# Altium PCB temperature_logger_pcb_v3.PcbDoc
Units mm, origin at the board's own origin, x right, y up, seen from the top; angles counter-clockwise.
Board outline 27 x 38 mm, 2 copper layers (Top Layer, Bottom Layer); 41 components, 32 nets, 188 pads, 42 vias.
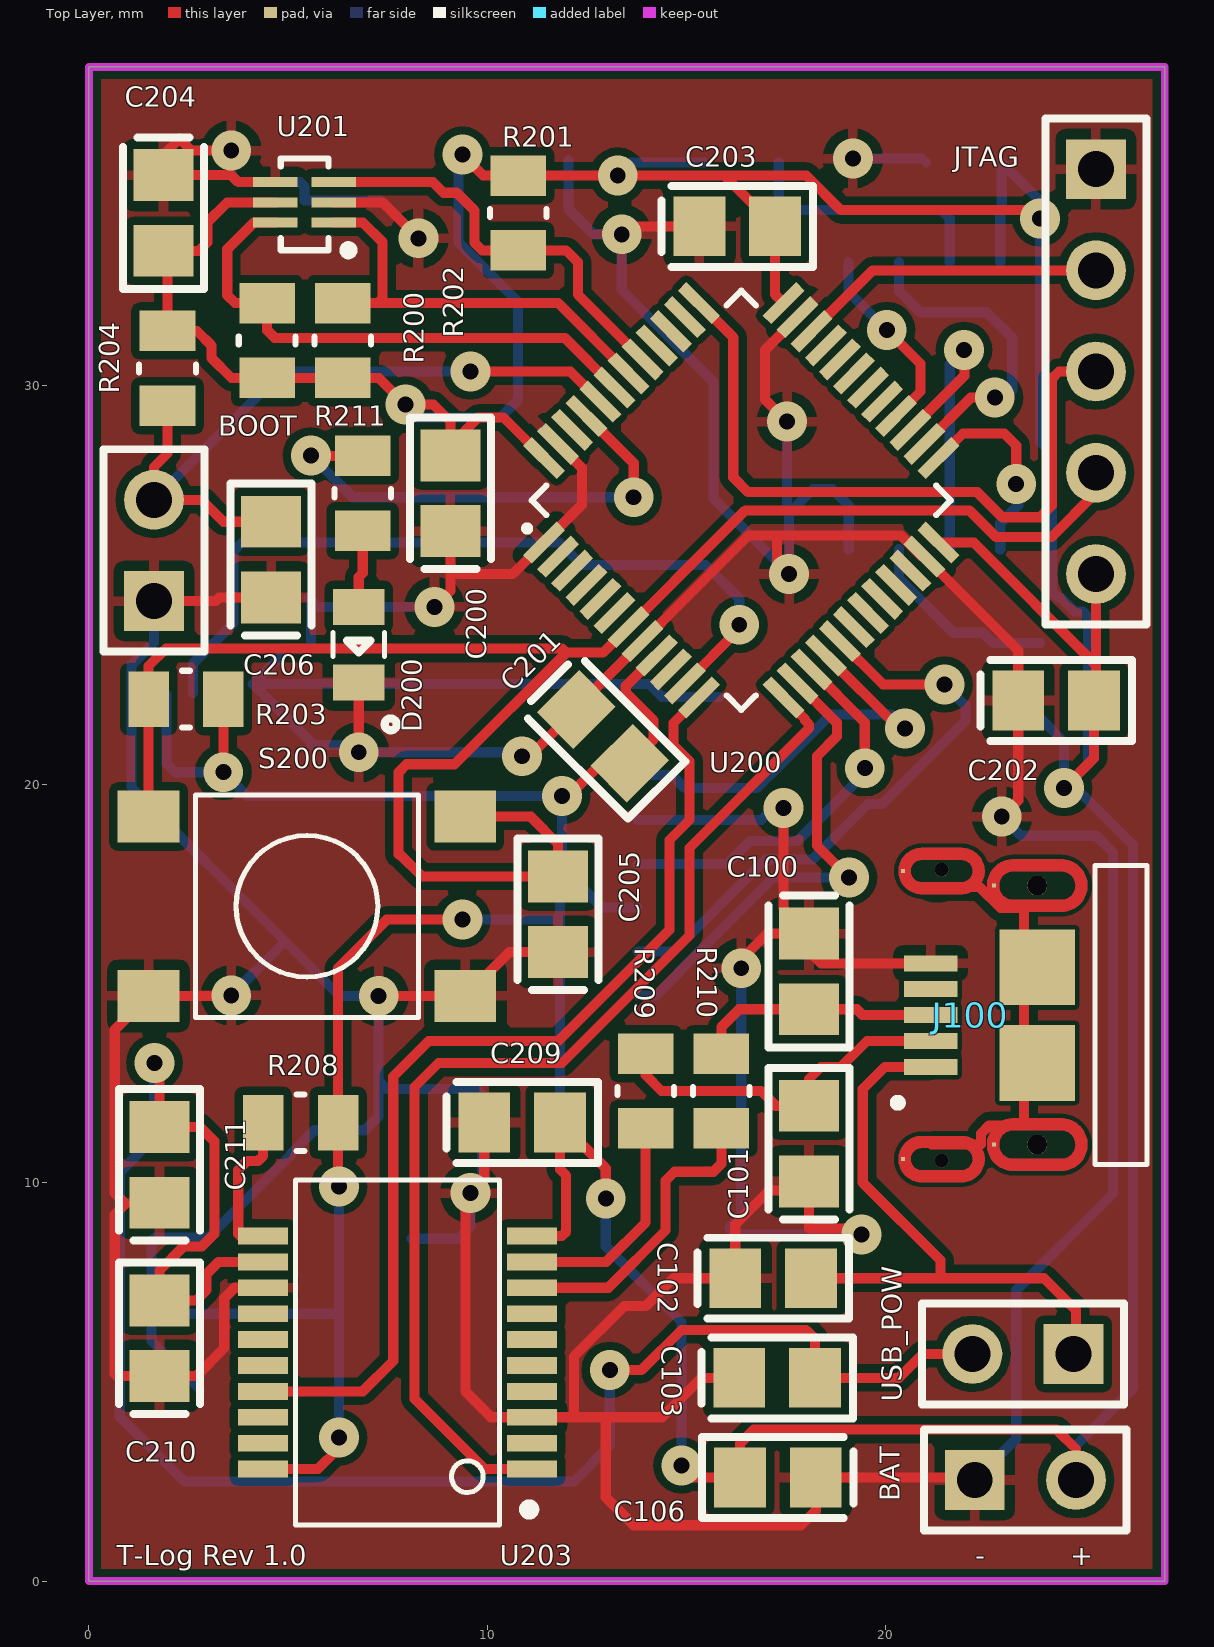
[diagram p0: Top Layer view]
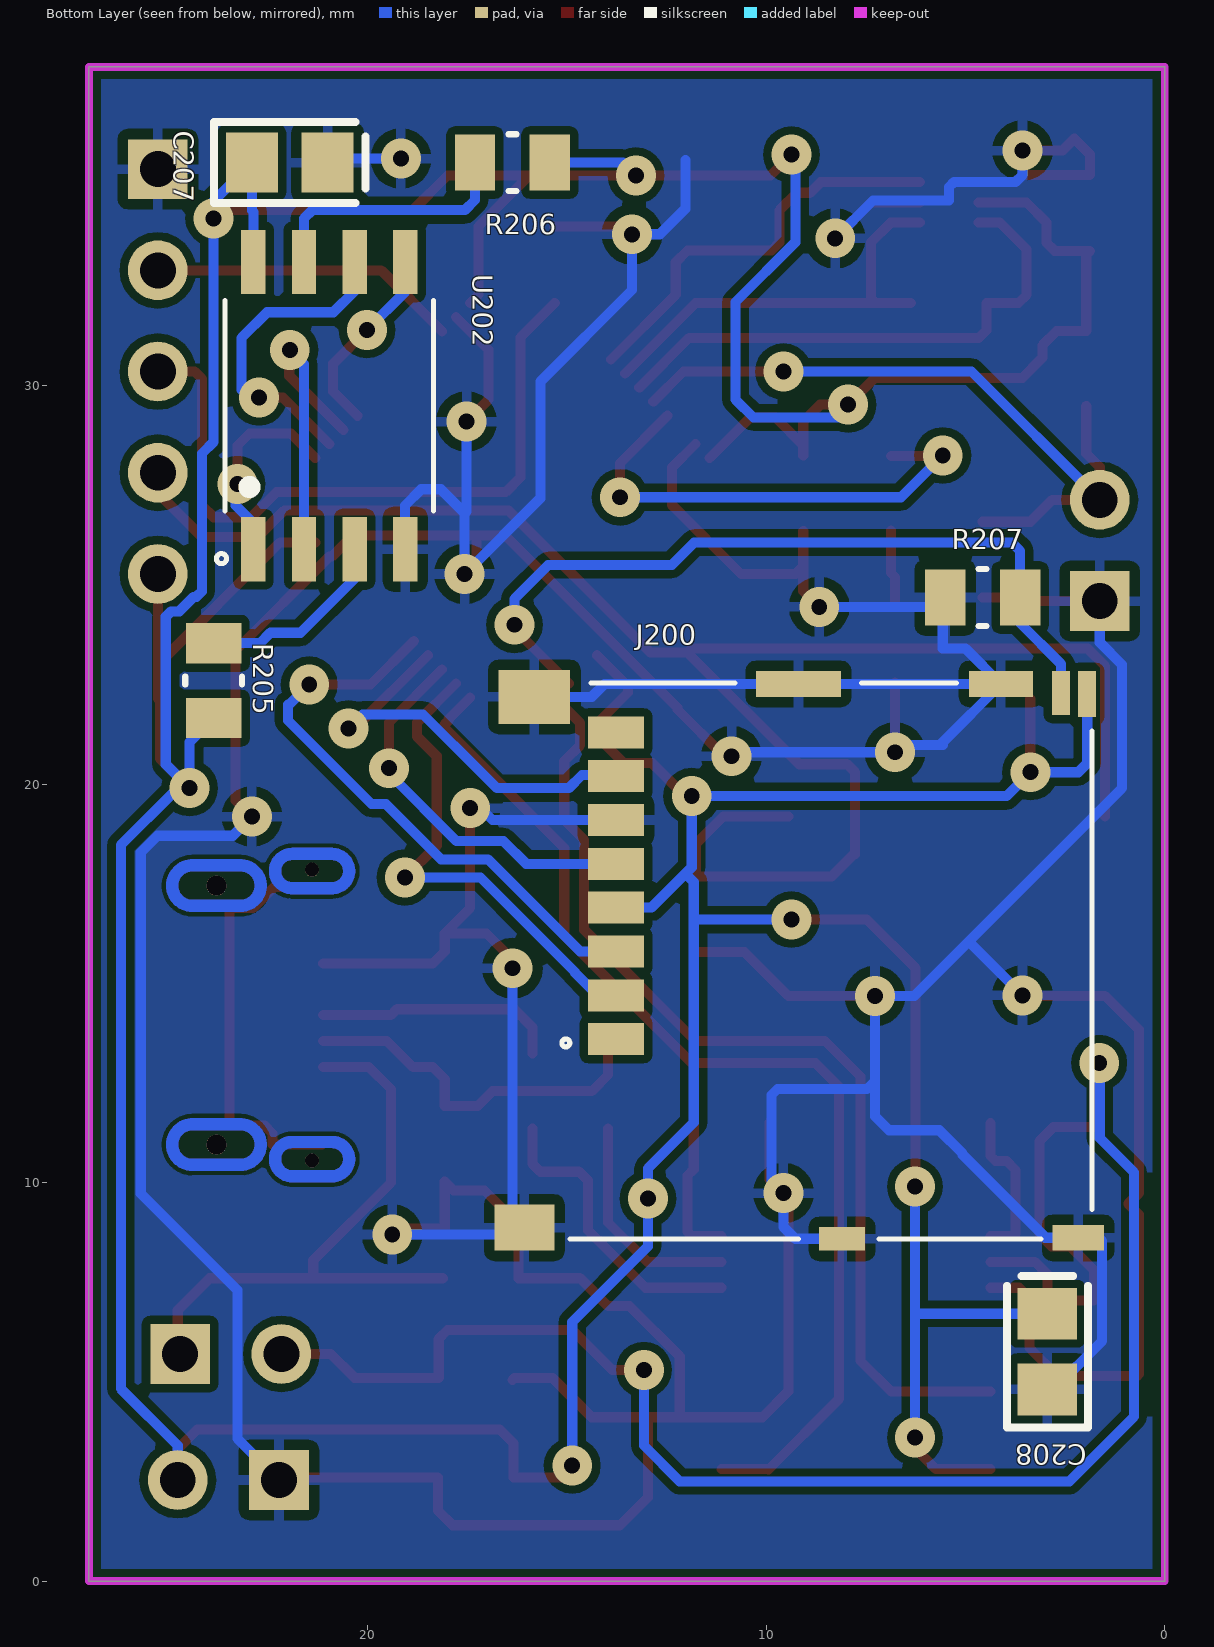
[diagram p1: Bottom Layer view, seen from below]

## Layer stack, top to bottom
Top Solder: solder mask 0.0102, Solder Resist, Dk 3.5
Top Layer: signal copper 0.0356
Dielectric 1: dielectric 0.32, FR-4, Dk 4.8
Bottom Layer: signal copper 0.0356
Bottom Solder: solder mask 0.0102, Solder Resist, Dk 3.5

## Board outline
0,0 0,38 27,38 27,0

## Design rules (kind name [scope] priority, off if disabled: settings)
Clearance STM32F4 [InComponent('U200')] p1: gap=0.152 ignorepadtopadclearanceinfootprint=FALSE
Clearance USB_PORT [InComponent('J100')] p2: gap=0.102 ignorepadtopadclearanceinfootprint=FALSE
Clearance [All] p3: gap=0.203 ignorepadtopadclearanceinfootprint=FALSE
MinimumSolderMaskSliver [All] p1: minsoldermaskwidth=0.152
PolygonConnect [All] p1: connectstyle=Relief reliefconductorwidth=0.254 reliefentries=4 polygonreliefangle="90 Angle" airgapwidth=0.254
RoutingVias [All] p1: holewidth=0.4 width=1 viastyle="Through Hole" minholewidth=0.3 minwidth=1 maxholewidth=0.711 maxwidth=1
SolderMaskExpansion [All] p1: expansion=0.102
Width [All] p1: maxlimit=0.381 minlimit=0.152 preferedwidth=0.254
29 further rules are at their usual default settings.

## Classes and differential pairs
component class 02_MCU: BOOT C200 C201 C202 C203 C204 C205 C206 C207 C208 C209 C210 C211 D200 J200 JTAG R200 R201 R202 R203 R204 R205 R206 R207 R208 R209 R210 R211 S200 U200 U201 U202 U203
component class 01_Power: BAT C100 C101 C102 C103 C106 J100 USB_POW

## Components (designator, comment, footprint, x,y, rotation, side; value= is the part's Value field where it differs from the comment)
BAT "" HDR1X2 22.232,2.535 r0 top
BOOT "" HDR1X2 1.632,24.595 r90 top
C100 "47 pF" C0805 18.072,15.3 r270 top
C101 "47 pF" C0805 18.072,10.977 r90 top
C102 "10 nF" C0805 17.172,7.6 r0 top
C103 "100 nF" C0805 17.272,5.1 r0 top
C106 "10 nF" C0805 17.293,2.6 r180 top
C200 "1000 pF" C0805 9.072,27.3 r90 top
C201 "1000 pF" C0805 12.901,21.2 r315 top
C202 "1000 pF" C0805 24.272,22.1 r0 top
C203 "1000 pF" C0805 16.272,34 r0 top
C204 "1000 pF" C0805 1.872,34.335 r270 top
C205 "1000 pF" C0805 11.772,16.735 r90 top
C206 "1000 pF" C0805 4.572,25.635 r90 top
C207 "1000 pF" C0805 21.96,35.6 r0 bottom
C208 "1000 pF" C0805 2.946,5.76 r270 bottom
C209 "100 nF" C0805 10.872,11.507 r0 top
C210 "1000 pF" C0805 1.771,6.093 r90 top
C211 "47 pF" C0805 1.771,10.443 r90 top
D200 "LGR971" D0805 6.772,23.5 r270 top value="Green LED"
J100 "USB_Micro_B" MicroUSB 23.8,14.204 r90 top value="USB Micro B"
J200 "MicroSD" MicroSD 9.022,15.565 r270 bottom
JTAG "" HDR1X5 25.272,35.435 r270 top
R200 "5 k" R0805 4.472,31.135 r90 top value=5k
R201 "5 k" R0805 10.772,34.335 r270 top value=5k
R202 "5 k" R0805 6.372,31.135 r90 top value=5k
R203 "1 k" R0805 2.436,22.135 r180 top value=1k
R204 "1 k" R0805 1.972,30.435 r270 top value=1k
R205 "1 k" R0805 23.872,22.6 r90 bottom value=1k
R206 "1 k" R0805 16.372,35.6 r0 bottom value=1k
R207 "10 k" R0805 4.572,24.685 r0 bottom value=10k
R208 "1 k" R0805 5.311,11.5 r180 top value=1k
R209 "27" R0805 13.972,12.3 r90 top
R210 "27" R0805 15.872,12.3 r90 top
R211 "1 k" R0805 6.872,27.3 r90 top value=1k
S200 "Switch_tactile" Tactile1 5.472,16.935 r180 top value=Switch_Tactile
U200 "STM32L053" LQFP48-7x7mm 16.372,27.124 r45 top locked value=STM32L053C8T6
U201 "TMP112" SOT563 5.413,34.6 r180 top value=TMP112AIDRLT
U202 "16MB_FLASH" 8-SOIC 20.968,29.5 r90 bottom value=MX25R1635FM2IH1
U203 "FT231XS-R" SSOP20 7.746,5.735 r90 top
USB_POW "" HDR1X2 24.712,5.7 r180 top

## Footprints (in the part's own frame and the unit in brackets; to place one, negate y for a bottom-side part, rotate by r counter-clockwise, add the part's x,y. Pads: shape width x height; smd on the part's side, far side on the other; paste and mask are expansions set on the pad)
8-SOIC [mm]
  rect 1.61x0.61 smd: 1(-3.605,1.905) 2(-3.605,0.635) 3(-3.605,-0.635) 4(-3.605,-1.905) 5(3.605,-1.905) 6(3.605,-0.635) 7(3.605,0.635) 8(3.605,1.905)
  silkscreen extent -3.97,-2.62 2.64,2.83
C0805 [mm] "Chip Capacitor; Body 2.0 x 1.2 mm (LxW typ)"
  rect 1.3x1.5 smd: 1(-0.95,0) 2(0.95,0)
  silkscreen extent -1.9,-1.02 1.91,1.02
D0805 [mm]
  rect 0.9x1.3 smd: A(-0.95,0) C(0.95,0)
  silkscreen extent -0.3,-0.65 2.15,0.95
HDR1X2 [mm] "Connector; Header; 2 Position"
  rect 1.5x1.5 hole 0.9: 1(0,0)
  round 1.5 hole 0.9: 2(2.54,0)
  silkscreen extent -1.27,-1.27 3.81,1.27
HDR1X5 [mm] "Connector; Header; 5 Position"
  rect 1.5x1.5 hole 0.9: 1(0,0)
  round 1.5 hole 0.9: 2(2.54,0) 3(5.08,0) 4(7.62,0) 5(10.16,0)
  silkscreen extent -1.27,-1.27 11.43,1.27
LQFP48-7x7mm [mm]
  rect 1.194x0.305 smd: 1(-4.25,2.75) 2(-4.25,2.25) 3(-4.25,1.75) 4(-4.25,1.25) 5(-4.25,0.75) 6(-4.25,0.25) 7(-4.25,-0.25) 8(-4.25,-0.75) 9(-4.25,-1.25) 10(-4.25,-1.75) 11(-4.25,-2.25) 12(-4.25,-2.75) 25(4.25,-2.75) 26(4.25,-2.25) 27(4.25,-1.75) 28(4.25,-1.25) 29(4.25,-0.75) 30(4.25,-0.25) 31(4.25,0.25) 32(4.25,0.75) 33(4.25,1.25) 34(4.25,1.75) 35(4.25,2.25) 36(4.25,2.75)
  rect 0.305x1.194 smd: 13(-2.75,-4.25) 14(-2.25,-4.25) 15(-1.75,-4.25) 16(-1.25,-4.25) 17(-0.75,-4.25) 18(-0.25,-4.25) 19(0.25,-4.25) 20(0.75,-4.25) 21(1.25,-4.25) 22(1.75,-4.25) 23(2.25,-4.25) 24(2.75,-4.25) 37(2.75,4.25) 38(2.25,4.25) 39(1.75,4.25) 40(1.25,4.25) 41(0.75,4.25) 42(0.25,4.25) 43(-0.25,4.25) 44(-0.75,4.25) 45(-1.25,4.25) 46(-1.75,4.25) 47(-2.25,4.25) 48(-2.75,4.25)
  silkscreen extent -4.38,-3.72 3.72,3.72, body extent 0,0 0.25,0.25, height 0.25
MicroSD [mm]
  rect 0.8x1.4 smd: 1(1.965,-4.75) 2(0.865,-4.75) 3(-0.235,-4.75) 4(-1.335,-4.75) 5(-2.435,-4.75) 6(-3.535,-4.75) 7(-4.635,-4.75) 8(-5.735,-4.75)
  rect 1.15x0.45 smd: 9(-6.7,7.075)
  rect 1.1x0.45 smd: 10(-6.725,6.415)
  rect 1.35x1.8 smd: 11(-6.625,-6.8)
  rect 0.65x2.14 smd: 12(-6.95,-0.17)
  rect 0.65x1.6 smd: 13(-6.95,4.91)
  rect 0.65x1.3 smd: 14(6.95,6.85)
  rect 0.6x1.15 smd: 15(6.975,0.925)
  rect 1.16x1.5 smd: 16(6.695,-7.05)
  silkscreen extent -6.98,-6.11 6.98,7.2
MicroUSB [mm]
  rect 0.4x1.35 smd: 1(-1.3,2.675) 2(-0.65,2.675) 3(0,2.675) 4(0.65,2.675) 5(1.3,2.675)
  round 0.35 hole 0.35 unplated: None(-3.65,2.4) None(3.65,2.4)
  round 0.5 hole 0.5 unplated: None(-3.25,0) None(3.25,0)
  rect 0.1x0.1 smd: S1(-3.25,1.08) S2(3.25,1.08) S3(-3.615,3.369) S6(3.615,3.369)
  rect 1.9x1.9 smd: S4(-1.2,0) S5(1.2,0)
  Top Layer region: 258 vertices and 0 holes, not listed, extent -3.91,-1.26 -2.59,1.26
  Top Layer region: 258 vertices and 0 holes, not listed, extent 2.59,-1.26 3.91,1.26
  Top Layer region: 258 vertices and 0 holes, not listed, extent -4.195,1.32 -3.035,3.48
  Top Layer region: 258 vertices and 0 holes, not listed, extent 3.035,1.32 4.195,3.48
  Bottom Layer region: 258 vertices and 0 holes, not listed, extent -3.91,-1.26 -2.59,1.26
  Bottom Layer region: 258 vertices and 0 holes, not listed, extent 2.59,-1.26 3.91,1.26
  Bottom Layer region: 258 vertices and 0 holes, not listed, extent -4.195,1.32 -3.035,3.48
  Bottom Layer region: 258 vertices and 0 holes, not listed, extent 3.035,1.32 4.195,3.48
  silkscreen extent -3.75,-2.75 3.75,3.6
R0805 [mil]
  rect 40x55 smd: 1(-37,0) 2(37,0)
  silkscreen extent -4,-28 4,28
SOT563 [mil]
  rect 44x10 smd: 1(-29,20) 2(-29,0) 3(-29,-20) 4(29,-20) 5(29,0) 6(29,20)
  silkscreen extent -47,-43 24,51
SSOP20 [mm]
  rect 0.42x1.25 smd: P$1(-2.925,-3.375) P$2(-2.275,-3.375) P$3(-1.625,-3.375) P$4(-0.975,-3.375) P$5(-0.325,-3.375) P$6(0.325,-3.375) P$7(0.975,-3.375) P$8(1.625,-3.375) P$9(2.275,-3.375) P$10(2.925,-3.375) P$11(2.925,3.375) P$12(2.275,3.375) P$13(1.625,3.375) P$14(0.975,3.375) P$15(0.325,3.375) P$16(-0.325,3.375) P$17(-0.975,3.375) P$18(-1.625,3.375) P$19(-2.275,3.375) P$20(-2.925,3.375)
  silkscreen extent -4.33,-3.43 4.33,2.56
Tactile1 [mm] "6 mm x 6 mm"
  rect 1.55x1.3 smd: 1(-3.975,2.25) 2(3.975,2.25) 3(-3.975,-2.25) 4(3.975,-2.25)
  silkscreen extent -2.79,-2.79 2.79,2.79

## Part data
BAT BOOT USB_POW: library part "Header 2", "Header, 2-Pin", LatestRevisionDate=17-Jul-2002, LatestRevisionNote="Re-released for DXP Platform.", Publisher="Altium Limited"
C100 C101 C211: library part Cap-47pF, "CAP CER 47PF 1KV C0G/NP0 0805", Manufacturer=KEMET, Manufacturer Part Number=C0805C470JDGACTU, Package=C0805, Digikey_link=https://www.digikey.com.au/product-detail/en/kemet/C0805C470JDGACTU/399-7157-1-ND/3439404, Price="0.62 AUD"
C102 C106: library part Cap-10nF, "CAP CER 10000PF 10V X7R 0805", Manufacturer="Wurth Electronics Inc.", Manufacturer Part Number=885012207011, Package=C0805, Digikey_link=https://www.digikey.com.au/product-detail/en/wurth-electronics-inc/885012207011/732-8021-1-ND/5454648, Price="0.15 AUD"
C103 C209: library part Cap-100nF, "CAP CER 0.1UF 50V X7R 0805", Manufacturer=KEMET, Manufacturer Part Number=C0805X104K5RACTU, Package=C0805, Digikey_link=https://www.digikey.com.au/product-detail/en/kemet/C0805X104K5RACTU/399-5330-1-ND/1842309, Price="0.46 AUD"
C200 C201 C202 C203 C204 C205 C206 C207 C208 C210: library part Cap-1000pF, "CAP CER 1000PF 100V X7R 0805", Manufacturer=KEMET, Manufacturer Part Number=C0805C102K1RACTU, Package=C0805, Digikey_link=https://www.digikey.com.au/product-detail/en/kemet/C0805C102K1RACTU/399-1148-2-ND/411147, Price="0.035 USD"
D200: "LED GREEN DIFFUSED 0805 SMD", Manufacturer="Osram Opto", Manufacturer Part Number="LG R971-KN-1", Package=LED0805, Digikey_link=https://www.digikey.com.au/product-detail/en/osram-opto-semiconductors-inc/LG-R971-KN-1/475-1410-2-ND/1227925, Price="0.09 USD"
J100: "USB - micro B USB 2.0 Receptacle Connector 5 Position Surface Mount, Right Angle; Through Hole", Manufacturer="TE Connectivity", Manufacturer Part Number=2040002-1, Package=USB-Micro-B, Digikey_link=https://www.digikey.com.au/product-detail/en/te-connectivity-amp-connectors/2040002-1/A108263CT-ND/4021990, Price="3.03 USD", Product_Type=Connector
J200: "MICRO SD PUSH PUSH LOW PROFILE TYPE", Manufacturer="TE Connectivity", Manufacturer Part Number=2201778-1, Digikey_link=https://www.digikey.com.au/product-detail/en/te-connectivity-amp-connectors/2201778-1/A118117CT-ND/4729820, Package=MicroSD, Price="3.61 USD", Product_Type="Removable Memory Products"
JTAG: library part "Header 5", "Header, 5-Pin", LatestRevisionDate=17-Jul-2002, LatestRevisionNote="Re-released for DXP Platform.", Publisher="Altium Limited"
R200 R201 R202: library part Res-5k, "RES SMD 4.7K OHM 0.1% 1/8W 0805", Manufacturer="Panasonic Electronic Components", Manufacturer Part Number=ERA-6AEB472V, Package=R0805, Digikey_link=https://www.digikey.com.au/product-detail/en/panasonic-electronic-components/ERA-6AEB472V/P4.7KDACT-ND/1465963, Price="0.51 AUD"
R203 R204 R205 R206 R208 R211: library part Res-1k, "RES 1K OHM 0.1% 1/5W 0805", Manufacturer="Vishay Dale", Manufacturer Part Number=TNPW08051K00BEEA, Package=R0805, Digikey_link=https://www.digikey.com.au/product-detail/en/vishay-dale/TNPW08051K00BEEA/TNP1.00KABTR-ND/1607282, Price="0.03 USD"
R207: library part Res-10k, "RES SMD 10K OHM 0.1% 1/8W 0805", Manufacturer="Panasonic Electronic Components", Manufacturer Part Number=ERA-6AEB103V, Package=R0805, Digikey_link=https://www.digikey.com/product-detail/en/panasonic-electronic-components/ERA-6AEB103V/P10KDACT-ND/1465971, Price="0.36 AUD"
R209 R210: library part Res-27, "RES SMD 27 OHM 5% 1/8W 0805", Manufacturer="Panasonic Electronic Components", Manufacturer Part Number=ERJ-6GEYJ270V, Package=R0805, Digikey_link=https://www.digikey.com.au/product-detail/en/panasonic-electronic-components/ERJ-6GEYJ270V/P27ACT-ND/42810, Price="0.11 AUD"
S200: "SWITCH TACTILE SPST-NO 0.05A 12V", Manufacturer="C&K Components", Manufacturer Part Number=PTS645SM43SMTR, Package=6x6, Digikey_link=https://www.digikey.com.au/product-detail/en/c-k/PTS645SM43SMTR92-LFS/CKN9112CT-ND/1146934, Price="0.22 USD"
U200: library part STM32L0x3CL4, "IC MCU 32BIT 64KB FLASH 48LQFP", Manufacturer=STMicroelectronics, Manufacturer Part Number=STM32L053C8T6, Package=48LQFP, Digikey_link=https://www.digikey.com.au/product-detail/en/stmicroelectronics/STM32L053C8T6/497-14906-ND/4935255, Price="5.66 AUD"
U201: library part TMP112AIDRLT, "1.4V-Capable ?0.5?C Temperature Sensor with Alert Function and I2C/SMBus interface in SOT-563 6-SOT -40 to 125", Manufacturer="Texas Instruments", Package=SOT-563, Digikey_link=https://www.digikey.com/product-detail/en/texas-instruments/TMP112AIDRLR/296-38578-2-ND/2232593, Manufacturer Part Number=TMP112AIDRLT, Price="1 USD"
U202: library part MX25R1635, "IC FLASH 16M SPI 80MHZ 8SOP", Manufacturer=Macronix, Manufacturer Part Number=MX25R1635FM2IL0, Package=SOP-8, Digikey_link=https://www.digikey.com/product-detail/en/macronix/MX25R1635FM2IH1/1092-1176-ND/5957737, Price="0.97 USD"
U203: "USB Full Speed to Full Handshake UART with USB Charger Detection", Package="SSOP-20 FTDI", Availability=Good, MF=FTDI,, MP=FT231XS-R, Price="1.80 USD", SnapEDA_Link=https://www.snapeda.com/parts/FT231XS-R/FTDI%2C%20Future%20Technology%20Devices%20International%20Ltd/view-part/?ref=snap

## Via types
v1: diameter 1, hole 0.4, Top Layer to Bottom Layer, 42 vias

## Nets (pads, with @x,y where several pads share a name; then routed paths per layer and width w, separated by ;. In a path a pad name is that pad's centre, name@x,y a point inside that pad or via, vN(x,y) a via of type N, cw(c..) or ccw(c..) an arc to the next point about the centre after c; other vN are vias at no path point)
3V: BAT.2 C106.2 C200.2 C201.2 C202.2 C203.2 C204.2 C207.2 C208.1 C209.2 J200.4 J200.9 JTAG.5 R200.1 R201.1 R202.1 R203.1 R204.1 R205.1 R206.1 R208.1 U200.9 U200.24 U200.36 U200.48 U201.5 U202.8 U203.P$10 U203.P$20 | length 182.2
  Top Layer w0.254: v1(3.372,20.3) 3.376,20.305 R203.1 ; U203.P$20 5.746,2.81 6.251,3.315 6.251,3.579 v1(6.272,3.6) ; U201.5 3.472,34.6 2.972,34.1 2.972,33.595 2.761,33.385 C204.2 1.972,33.285 R204.1 2.71,31.375 3.072,31.013 3.072,30.7 3.576,30.195 R200.1 R202.1 7.276,30.195 v1(7.946,29.525) 8.647,29.525 9.072,29.1 C200.2@9.072,28.5 ; v1(6.272,9.9) 6.251,9.921 R208.1 6.251,15.379 7.472,16.6 v1(9.372,16.6) ; C200.2 C200.2@9.072,28.5 ; v1(9.372,35.8) 9.897,35.275 R201.1 v1(13.272,35.275) 15.947,35.275 ; U203.P$10 11.872,8.66 11.976,8.765 11.976,10.178 11.822,10.333 C209.2 12.972,10.357 v1(12.972,9.6) ; U200.48 10.407,29.2 9.772,29.2 C200.2@9.072,28.5 ; v1(11.872,19.7) 12.032,19.7 12.86,20.528 C201.2 14.172,21.127 14.172,21.6 13.472,22.3 13.472,22.456 U200.9 ; v1(14.872,2.9) 15.172,2.6 C106.2 16.343,3.459 16.684,3.8 24.287,3.8 24.772,3.315 BAT.2 ; U200.36 17.222,32.284 C203.2 15.947,35.275 ; U200.24 22.208,26.063 25.272,23 ; v1(23.872,34.2) 23.772,34.2 23.565,34.407 18.872,34.407 18.004,35.275 15.947,35.275 ; v1(24.473,19.9) 25.222,20.648 C202.2 25.272,22.15 25.272,23 ; JTAG.5 25.272,23
  Bottom Layer w0.254: J200.9 1.947,20.525 2.172,20.3 v1(3.372,20.3) 3.972,19.7 v1(11.872,19.7) 11.872,17.913 12.032,17.753 ; C208.1@2.397,6.71 C208.1 6.262,6.71 6.272,6.7 ; v1(6.272,3.6) 6.272,6.7 ; v1(6.272,9.9) 6.272,6.7 ; v1@7.946,29.2 10.322,29.2 10.772,29.65 10.772,32.1 9.272,33.6 9.272,35.7 9.312,35.66 9.372,35.72 v1(9.372,35.8) ; v1(9.372,16.6) 11.822,16.6 ; v1(13.272,35.275) 13.597,35.6 R206.1 ; J200.4 12.885,16.9 12.032,17.753 ; v1(14.872,2.9) 14.872,6.5 12.972,8.4 v1(12.972,9.6) 12.972,10.357 11.822,11.507 11.822,16.6 ; U202.8 22.873,34.363 22.91,34.4 C207.2 23.872,34.638 v1(23.872,34.2) 23.872,28.593 24.165,28.3 24.165,24.841 24.305,24.7 24.372,24.7 24.734,24.337 24.934,24.337 25.072,24.2 25.072,20.498 v1(24.473,19.9) ; R205.1 24.473,21.058 v1(24.473,19.9) ; BAT.2 24.772,3.4 26.2,4.828 26.2,18.472 24.872,19.8 24.573,19.8 v1(24.473,19.9) ; 11.822,16.6 11.822,17.543 12.032,17.753
5V: C103.2 C210.2 C211.2 U203.P$12 USB_POW.2 | length 47.5
  Top Layer w0.254: v1(1.644,13.004) 1.644,13.073 1.771,13.2 C211.2 2.778,11.393 2.785,11.4 3.146,11.038 3.146,8.71 2.836,8.4 2.376,8.4 1.771,7.795 C210.2 2.689,7.043 2.946,7.3 2.946,7.7 3.256,8.01 U203.P$12 ; v1(13.072,5.3) 13.872,5.3 14.872,6.3 18,6.3 18.222,6.078 C103.2 20.328,5.1 20.928,5.7 USB_POW.2
  Bottom Layer w0.254: v1(1.644,13.004) 1.644,13.248 1.632,13.26 1.632,11.117 0.772,10.257 0.772,4.125 2.397,2.5 12.172,2.5 13.072,3.4 v1(13.072,5.3)
ALERT: R201.2 U200.41 U201.3 | length 10.5
  Top Layer w0.254: U201.3 8.635,35.108 8.9,34.843 9.229,34.843 9.672,34.4 9.672,33.595 9.872,33.395 R201.2 11.976,33.395 12.272,33.1 12.272,32.285 U200.41
BOOT0: BOOT.2 C206.2 R204.2 U200.44 | length 18.5
  Top Layer w0.254: R204.2 1.972,28.3 1.632,27.96 BOOT.2 2.826,27.135 3.376,26.585 C206.2 ; v1(9.572,30.355) 12.08,30.355 U200.44
  Bottom Layer w0.254: BOOT.2 4.852,30.355 v1(9.572,30.355)
CARD_DETECT: J200.10 R207.1 U200.11 | length 20
  Top Layer w0.254: U200.11 16.322,23.892 v1(16.322,24)
  Bottom Layer w0.254: J200.10 2.607,23.019 3.632,24.044 R207.1 3.632,25.854 3.841,26.063 11.808,26.063 12.372,25.5 15.472,25.5 16.322,24.65 v1(16.322,24)
FLASH_CSN: U200.25 U202.1 | length 5.2
  Top Layer w0.254: U200.25 21.937,28.8 22.972,28.8 23.272,28.5 v1(23.272,27.535)
  Bottom Layer w0.254: U202.1 22.873,26.551 23.322,27 23.322,27.485 v1(23.272,27.535) v1@23.322,27.535
FLASH_MISO: U200.27 U202.2 | length 7.8
  Top Layer w0.254: U200.27 21.972,30.249 21.972,30.888 v1(21.96,30.9)
  Bottom Layer w0.254: U202.2 21.603,30.543 v1(21.96,30.9) v1@21.982,30.878
FLASH_MOSI: U200.28 U202.5 | length 4.9
  Top Layer w0.254: v1(20.025,31.4) 20.872,30.553 20.872,29.856 U200.28
  Bottom Layer w0.254: U202.5 19.063,32.362 v1(20.025,31.4)
FLASH_SCLK: U200.26 U202.6 | length 8.1
  Top Layer w0.254: U200.26 22.129,29.7 v1(22.734,29.7)
  Bottom Layer w0.254: U202.6 20.333,32.377 20.866,31.844 22.528,31.844 23.172,31.2 23.172,29.9 22.972,29.7 v1(22.734,29.7)
FT_RX: U200.13 U203.P$1 | length 27.5
  Top Layer w0.254: U203.P$1 9.956,2.81 9.946,2.8 8.172,4.575 8.172,12.4 8.772,13 11.872,13 15.072,16.2 15.072,18.4 18.072,21.4 18.072,21.5 17.972,21.6 17.972,21.635 U200.13
FT_TX: U200.12 U203.P$17 | length 25.6
  Top Layer w0.254: U203.P$17 6.872,4.76 7.637,5.525 7.637,12.665 8.525,13.554 11.779,13.554 14.572,16.347 14.572,18.6 15.072,19.1 15.072,20.58 14.672,20.98 14.672,21.535 U200.12
GND: BAT.1 BOOT.1 C100.1 C101.1 C102.1 C103.1 C106.1 C200.1 C201.1 C202.1 C203.1 C204.1 C205.1 C206.1 C207.1 C208.2 C209.1 C210.1 C211.1 D200.C J100.5 J200.6 J200.11 J200.12 J200.13 J200.14 J200.15 J200.16 JTAG.1 R207.2 S200.1 S200.2 U200.1 U200.8 U200.23 U200.35 U200.47 U201.2 U201.4 U202.4 U203.P$3 U203.P$13 | length 243.7
  Top Layer w0.254: BOOT.1 3.182,24.595 3.272,24.685 C206.1 ; v1(3.572,14.7) 3.557,14.685 S200.2 0.646,13.835 0.646,9.735 0.914,9.468 0.646,9.2 0.646,5.2 0.704,5.143 C210.1 2.689,5.143 3.396,5.85 3.396,7.1 3.656,7.36 U203.P$13 ; v1(3.572,35.9) 2.572,35.9 2.272,36.2 1.872,35.8 C204.1 3.572,35.285 3.749,35.108 U201.4 ; U201.2 7.372,34.6 v1(8.272,33.7) ; v1(6.772,20.8) D200.C ; v1(7.272,14.685) S200.1 10.547,15.785 C205.1 ; v1(8.672,24.45) 9.072,24.85 9.072,25.475 ; C200.1 9.072,25.475 ; C209.1 9.922,10.085 v1(9.572,9.735) 9.447,9.61 9.447,4.76 10.097,4.11 U203.P$3 12.172,4.11 ; v1(10.872,20.7) 11.058,20.7 C201.1 12.229,21.921 16.551,26.243 17.272,26.243 ; U200.47 12.372,27.942 12.372,27.013 10.633,25.275 9.272,25.275 9.072,25.475 ; v1(13.372,33.8) 13.572,34 C203.1 ; C103.1@16.372,5.05 C103.1 15.372,5.1 14.382,4.11 12.972,4.11 ; v1(16.372,15.379) 16.372,15.6 17.022,16.25 C100.1 ; v1(17.432,19.4) 17.432,16.889 C100.1 ; v1(17.522,29.1) 16.972,29.65 16.972,30.906 U200.35 ; v1(17.572,25.275) 17.272,25.575 17.272,26.243 ; v1(19.389,8.698) 19.24,8.847 18.072,8.847 C101.1 17.845,9.8 17.072,9.8 16.222,8.95 C102.1 14.672,7.6 13.972,6.9 13.432,6.9 12.172,5.64 12.172,4.11 ; J100.5 18.375,15.504 18.372,15.5 18.072,15.8 C100.1 ; BAT.1 22.167,2.6 C106.1 18.243,1.771 17.872,1.4 13.672,1.4 12.972,2.1 12.972,4.11 ; v1(22.91,19.185) 23.322,19.597 23.322,23.356 U200.23 20.908,25.71 20.376,26.243 17.272,26.243 ; 12.172,4.11 12.972,4.11
  Bottom Layer w0.254: BOOT.1 1.632,23.56 1.072,23 1.072,19.9 4.872,16.1 ; C208.2@2.785,4.81 1.572,6.023 1.572,8.53 1.657,8.615 J200.14 2.988,8.615 5.072,10.699 5.072,10.729 5.657,11.314 6.923,11.314 7.272,11.662 7.272,12.55 ; v1(3.572,14.7) 4.872,16 4.872,16.1 ; v1(3.572,35.9) 3.572,35.285 3.749,35.108 5.292,35.108 5.413,34.987 5.413,34.65 7.322,34.65 v1(8.272,33.7) ; R207.2 R207.2@5.572,24.625 ; J200.15 9.272,8.59 9.572,8.89 v1(9.572,9.735) 9.872,10.035 9.872,12.2 9.722,12.35 7.472,12.35 7.272,12.55 ; v1(8.672,24.45) 5.746,24.45 R207.2@5.572,24.625 ; v1(10.872,20.7) 10.772,20.8 v1(6.772,20.8) 6.592,20.98 5.572,20.98 5.572,21.055 J200.13 ; 12.032,35.66 12.032,34.44 12.672,33.8 v1(13.372,33.8) 13.372,32.4 15.672,30.1 15.672,27.175 v1(17.572,25.275) 17.572,26.8 ; J200.6 16.872,19.1 17.172,19.4 v1@17.297,19.4 ; J200.11 14.382,22.19 14.057,22.515 J200.12 J200.13 ; v1(16.372,15.379) 16.372,9.17 J200.16 16.244,8.698 v1(19.389,8.698) ; v1(17.522,29.1) 17.522,26.85 17.572,26.8 ; U202.4 19.069,25.902 19.069,26.993 18.663,27.4 18.172,27.4 17.572,26.8 ; v1@19.172,35.8 v1(19.172,35.7) 20.91,35.7 C207.1 ; BAT.1 23.272,3.575 23.272,7.3 25.7,9.728 25.7,18.283 25.279,18.704 23.391,18.704 v1(22.91,19.185) ; J200.13 4.997,23.4 5.572,23.4 R207.2@5.572,24.625 ; 4.872,16.1 6.287,14.685 v1(7.272,14.685) 7.272,12.55
I2C_SCL: R202.2 U200.42 U201.1 | length 10.9
  Top Layer w0.254: U201.1 6.88,34.092 7.372,33.6 7.372,32.2 7.246,32.075 ; R202.2 7.246,32.075 ; U200.42 11.774,32.075 7.246,32.075
I2C_SDA: R200.2 U200.43 U201.6 | length 13.7
  Top Layer w0.254: U201.6 4.137,34.092 3.472,33.427 3.472,32.274 3.672,32.074 3.673,32.075 R200.2 4.472,31.388 4.66,31.2 11.942,31.2 U200.43
MICROSD_CLK: J200.5 U200.15 | length 9.8
  Top Layer w0.254: U200.15 19.472,21.549 v1(19.472,20.4)
  Bottom Layer w0.254: J200.5 16.028,18 16.6,18.572 17.086,18.572 17.088,18.57 17.776,18.57 19.472,20.265 v1(19.472,20.4)
MICROSD_CS: J200.2 U200.14 | length 12.4
  Top Layer w0.254: U200.14 18.772,21.542 18.772,21.2 18.272,20.7 18.272,18.458 v1(19.072,17.658)
  Bottom Layer w0.254: J200.2 14.239,14.7 14.802,15.263 14.802,15.284 17.174,17.655 19.069,17.655 v1(19.072,17.658)
MICROSD_DI: J200.3 U200.17 | length 14.9
  Top Layer w0.254: U200.17 19.935,22.5 v1(21.472,22.5)
  Bottom Layer w0.254: J200.3 14.672,15.8 16.984,18.113 18.164,18.113 19.552,19.5 19.907,19.5 22.003,21.595 22.003,22 21.972,22 v1(21.472,22.5)
MICROSD_DO: J200.7 U200.16 | length 10.5
  Top Layer w0.254: U200.16 20.328,21.4 v1(20.485,21.4)
  Bottom Layer w0.254: J200.7 13.802,20.23 14.625,20.23 14.955,19.9 16.758,19.9 17.088,20.23 17.095,20.23 18.614,21.749 20.136,21.749 v1(20.485,21.4)
NetC102_2: C102.2 J100.1 USB_POW.1 | length 15.6
  Top Layer w0.254: C102.2 21.372,7.6 ; J100.1 19.975,12.904 19.422,12.35 19.422,10 21.372,8.05 21.372,7.6 ; USB_POW.1 24.772,5.76 24.772,6.8 23.972,7.6 21.372,7.6
NetD200_A: D200.A R211.1 | length 2
  Top Layer w0.254: D200.A 6.772,25.2 6.872,25.3 R211.1
NetR205_2: R205.2 U202.3 | length 4.9
  Bottom Layer w0.254: U202.3 20.333,25.159 21.692,23.8 22.448,23.8 22.708,23.54 R205.2
NetR206_2: R206.2 U202.7 | length 6.5
  Bottom Layer w0.254: R206.2 17.311,34.66 17.565,34.407 21.396,34.407 21.603,34.2 U202.7
NetR208_2: R208.2 U203.P$11 | length 3.9
  Top Layer w0.254: U203.P$11 3.797,8.66 3.746,8.71 3.746,10.318 3.973,10.545 4.246,10.545 4.371,10.67 R208.2
NetR209_1: R209.1 U203.P$9 | length 5.6
  Top Layer w0.254: U203.P$9 12.982,8.01 13.972,9 R209.1
NetR210_1: R210.1 U203.P$8 | length 7.7
  Top Layer w0.254: U203.P$8 13.032,7.36 14.472,8.8 14.472,10.048 14.697,10.273 15.672,10.273 15.872,10.473 R210.1
NRST: C205.2 JTAG.4 R203.2 S200.3 S200.4 U200.7 | length 45.7
  Top Layer w0.254: S200.4 R203.2 1.497,22.965 1.932,23.4 11.876,23.4 11.976,23.3 ; S200.3 11.087,19.185 11.772,18.5 C205.2 8.357,17.685 7.802,18.239 7.772,18.239 7.772,20.3 7.972,20.5 9.176,20.5 11.976,23.3 ; JTAG.4 25.272,27.314 24.158,26.2 22.77,26.2 22.097,26.873 16.474,26.873 12.901,23.3 11.976,23.3
SHIELD_GND: J100.S1 J100.S2 J100.S3 J100.S4 J100.S5 J100.S6 | length 10.7
  Top Layer w0.254: 21.126,17.379 21.434,17.379 21.472,17.416 22.354,17.416 22.879,16.891 23.472,16.891 23.472,11.464 23.445,11.437 22.596,11.437 22.392,11.233 22.392,10.954 21.152,10.954
SWCLK: JTAG.3 U200.37 | length 17.6
  Top Layer w0.254: U200.37 16.172,31.213 16.172,27.7 16.542,27.33 22.295,27.33 22.925,26.7 23.872,26.7 24.165,26.993 24.165,30.173 24.347,30.355 JTAG.3
SWDIO: JTAG.2 U200.34 | length 7.8
  Top Layer w0.254: U200.34 19.668,32.895 JTAG.2
USB_DM: C101.2 J100.2 R209.2 | length 9.1
  Top Layer w0.254: R209.2 13.972,12.7 14.372,12.3 16.864,12.3 17.238,11.927 C101.2 18.072,12.6 18.372,12.9 18.872,12.9 19.525,13.554 J100.2
USB_DP: C100.2 J100.3 R210.2 | length 6.2
  Top Layer w0.254: R210.2 15.872,13.9 16.322,14.35 C100.2 19.272,14.35 19.418,14.204 J100.3
USER_LED: R211.2 U200.45 | length 12.4
  Top Layer w0.254: v1(5.572,28.25) 5.582,28.24 R211.2 ; U200.45 13.672,28.056 v1(13.672,27.2)
  Bottom Layer w0.254: v1(5.572,28.25) 6.622,27.2 v1(13.672,27.2)
pads on no net: J100.4 J100.None J200.1 J200.8 U200.2 U200.3 U200.4 U200.5 U200.6 U200.10 U200.18 U200.19 U200.20 U200.21 U200.22 U200.29 U200.30 U200.31 U200.32 U200.33 U200.38 U200.39 U200.40 U200.46 U203.P$2 U203.P$4 U203.P$5 U203.P$6 U203.P$7 U203.P$14 U203.P$15 U203.P$16 U203.P$18 U203.P$19

## Polygon pours and split planes (outlines as drawn)
GND on Top Layer "Top Layer-No Net" (solid, pour order 0): 0,38 27,38 27,0 0,0
GND on Bottom Layer "Top Layer-No Net" (solid, pour order 2): 0,38 27,38 27,0 0,0

## Keep-outs
Keep-Out Layer:
  the board outline again, w0.2

## Silkscreen, mask and mechanical layers (free items; w line width, h text height)
Top Overlay:
  text "T-Log Rev 1.0" at 0.7,0.4 h0.51
  text "-" at 22.241,0.4 h0.51
  text "+" at 24.629,0.4 h0.51
Mechanical 1:
  lines w0.254: -1.908,1.524 -1.4,0 ; -1.908,36.476 -1.4,38 ; -1.654,0 -1.146,0 ; -1.654,38 -1.146,38 ; -1.4,13.896 -1.4,0 ; -1.4,24.104 -1.4,38 ; -0.892,1.524 -1.4,0 ; -0.892,36.476 -1.4,38 ; 0,39.146 0,39.654 ; 1.524,38.892 0,39.4 ; 1.524,39.908 0,39.4 ; 8.396,39.4 0,39.4 ; 18.604,39.4 27,39.4 ; 25.476,38.892 27,39.4 ; 25.476,39.908 27,39.4 ; 27,39.146 27,39.654
  text "27 (mm)" at 8.65,38.486 h1.52
  text "38 (mm)" at -0.486,14.15 h1.52 r90

## Text inside footprints (layer, text, board x,y; h text height)
J100: Mechanical 1 "PCB EDGE" at 28,11.604 h0.76 r90